# Altium PCB Extender_Remastered_V1.PcbDoc (part 2 of 2)
Units mm, origin at the board's own origin, x right, y up, seen from the top; angles counter-clockwise.
Board outline 188 x 60 mm, 2 copper layers (Top Layer, Bottom Layer); 132 components, 144 nets, 525 pads, 128 vias.
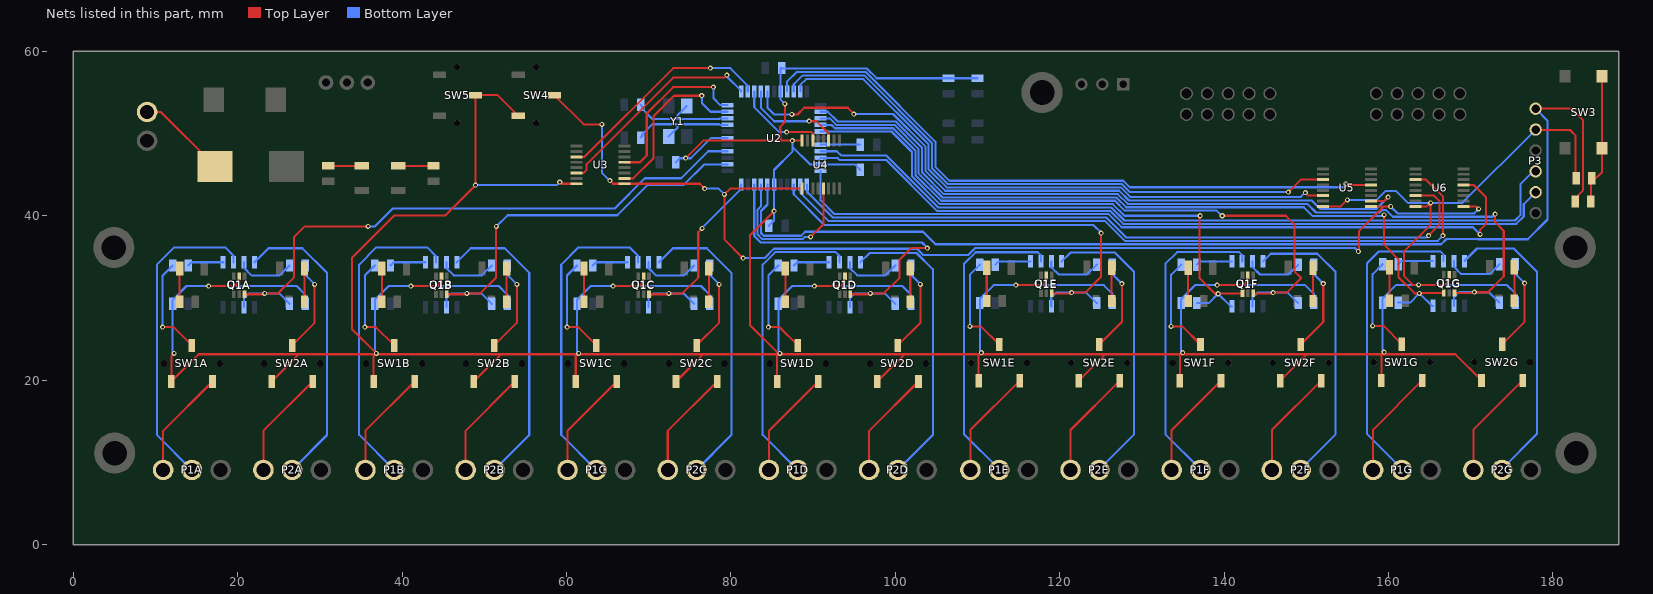
[diagram p2: the nets of this part, all layers, seen from the top]

## Via types
v1: diameter 0.61, hole 0.305, Top Layer to Bottom Layer, 128 vias

## Nets (pads, with @x,y where several pads share a name; then routed paths per layer and width w, separated by ;. In a path a pad name is that pad's centre, name@x,y a point inside that pad or via, vN(x,y) a via of type N, cw(c..) or ccw(c..) an arc to the next point about the centre after c; other vN are vias at no path point) (continued)
INA6: Q1F.8 R2F.2 U1F.1 U2.5 | length 71.1
  Top Layer w0.254: v1(137.075,40) 137.025,39.95 137.025,39.3 137.025,32.375 138.889,30.511 v1(139.26,30.511) 139.303,30.554 U1F.1@142.23,30.554
  Bottom Layer w0.254: U2.5@90.913,50.249 91.775,50.249 91.781,50.243 99.534,50.243 102.025,47.752 102.025,44.788 105.4,41.413 126.462,41.413 127.875,40 v1(137.075,40) ; R2F.2@136.678,29.377 138.126,29.377 v1(139.26,30.511) 140.789,28.982 Q1F.8@140.935,28.982
INA7: Q1G.8 R2G.2 U1G.1 U2.3 | length 95.3
  Top Layer w0.254: v1(159.475,40.1) 159.475,36.6 159.4,36.525 161.2,34.725 161.2,32.55 163.193,30.557 v1(163.76,30.557) 163.803,30.6 U1G.1@166.73,30.6
  Bottom Layer w0.254: U2.3@90.913,51.849 91.775,51.849 91.777,51.851 92.01,51.851 92.805,51.056 99.894,51.056 102.838,48.112 102.838,45.125 105.736,42.226 126.9,42.226 128.089,41.037 149.688,41.037 150.731,39.994 159.369,39.994 v1(159.475,40.1) ; R2G.2@161.178,29.423 162.626,29.423 v1(163.76,30.557) 165.289,29.028 Q1G.8@165.435,29.028
INA_MCU1: U2.34 U3.14 | length 26.3
  Top Layer w0.254: U3.14@61.229,45.21 62.085,45.21 62.45,45.575 62.45,46.276 72.974,56.8 79.2,56.8 v1(79.5,57.1)
  Bottom Layer w0.254: v1(79.5,57.1) 79.5,56.938 81.243,55.195 U2.34@81.243,55.119
INA_MCU2: U2.33 U3.5 | length 21
  Top Layer w0.254: U3.5@67.071,46.505 68.931,46.505 69.762,47.337 69.762,52.439 72.974,55.65 v1(77.875,55.65)
  Bottom Layer w0.254: v1@77.875,55.624 77.875,54.275 78.701,53.449 U2.33@79.573,53.449
INA_MCU3: U2.36 U4.14 | length 11.2
  Top Layer w0.254: v1(86.775,50.175) 89.825,50.175 89.96,50.04 U4.14@89.96,49.146
  Bottom Layer w0.254: U2.36@82.843,55.119 82.843,53.207 85.875,50.175 v1(86.775,50.175)
INA_MCU4: U2.19 U4.5 | length 19.5
  Top Layer w0.254: v1(89.7,37.425) 91.255,38.98 U4.5@91.255,43.304
  Bottom Layer w0.254: U2.19@83.643,43.779 83.643,41.143 83.249,40.749 83.249,37.726 83.819,37.156 88.706,37.156 88.975,37.425 v1(89.7,37.425)
INA_MCU5: U2.42 U5.11 | length 74
  Top Layer w0.254: v1(147.825,42.875) 149.34,44.39 U5.11@152.029,44.39
  Bottom Layer w0.254: U2.42@87.643,55.119 87.643,55.993 88.734,57.084 96.216,57.084 104.463,48.836 104.463,45.798 106.41,43.852 127.573,43.852 128.55,42.875 v1(147.825,42.875)
INA_MCU6: U2.38 U5.2 | length 87.9
  Top Layer w0.254: v1(87.425,52.325) 88.1,52.325 88.912,53.137 94.213,53.137 v1@94.95,52.4 ; U5.2@157.871,41.799 159.474,41.799 v1(159.95,42.275)
  Bottom Layer w0.254: U2.38@84.443,55.119 84.443,53.132 85.25,52.325 v1(87.425,52.325) ; v1(94.95,52.375) 99.724,52.375 103.651,48.448 103.651,45.461 106.073,43.039 127.237,43.039 128.426,41.85 150.675,41.85 151.7,40.825 158.5,40.825 v1(159.95,42.275)
INA_MCU7: U2.13 U6.11 | length 90.8
  Top Layer w0.254: U6.11@163.304,44.39 164.56,44.39 166.65,42.3 v1@166.65,37.575
  Bottom Layer w0.254: U2.13@88.443,43.779 88.443,42.8 91.862,39.381 125.494,39.381 127.935,36.94 165.99,36.94 v1(166.625,37.575)
INB1: Q1A.6 R3A.2 U1A.3 U2.26 | length 76.2
  Top Layer w0.254: U1A.3@20.83,30.454 23.166,30.454 v1(23.262,30.55) 24.9,30.55 26.825,32.475 26.825,37.375 28.15,38.7 v1(35.85,38.7)
  Bottom Layer w0.254: Q1A.6@20.775,28.882 20.775,29.963 21.362,30.55 v1(23.262,30.55) 25.029,30.55 R3A.2@26.302,29.277 ; v1(35.85,38.7) 36.7,38.7 38.875,40.875 65.85,40.875 69.537,44.562 73.943,44.562 77.231,47.849 U2.26@79.573,47.849
INB2: Q1B.6 R3B.2 U1B.3 U2.24 | length 56.6
  Top Layer w0.254: U1B.3@45.43,30.454 47.766,30.454 v1(47.862,30.55) 49.5,30.55 51.425,32.475 ; 51.425,37.375 51.425,32.475 ; v1(51.475,38.7) 51.425,38.65 51.425,32.475
  Bottom Layer w0.254: Q1B.6@45.375,28.882 45.375,29.963 45.962,30.55 v1(47.862,30.55) 49.629,30.55 R3B.2@50.902,29.277 ; v1(51.475,38.7) 52.837,40.062 66.187,40.062 69.873,43.749 74.28,43.749 76.78,46.249 U2.24@79.573,46.249
INB3: Q1C.6 R3C.2 U1C.3 U2.22 | length 32.6
  Top Layer w0.254: U1C.3@70.03,30.454 72.366,30.454 v1(72.462,30.55) 74.1,30.55 76.025,32.475 ; 76.025,37.375 76.025,32.475 ; v1(76.5,38.475) 76.025,38 76.025,32.475
  Bottom Layer w0.254: Q1C.6@69.975,28.882 69.975,29.963 70.562,30.55 v1(72.462,30.55) 74.229,30.55 R3C.2@75.502,29.277 ; v1(76.5,38.475) 76.5,38.531 81.243,43.274 U2.22@81.243,43.779
INB4: Q1D.6 R3D.2 U1D.3 U2.20 | length 48.3
  Top Layer w0.254: U1D.3@94.53,30.454 96.866,30.454 v1(96.962,30.55) 98.6,30.55 100.525,32.475 100.525,34.675 101.925,36.075 v1(103.9,36.075)
  Bottom Layer w0.254: U2.20@82.843,43.779 82.843,37.532 83.625,36.75 103.25,36.75 v1@103.9,36.1 ; Q1D.6@94.475,28.882 94.475,29.963 95.062,30.55 v1(96.962,30.55) 98.729,30.55 R3D.2@100.002,29.277
INB5: Q1E.6 R3E.2 U1E.3 U2.14 | length 60
  Top Layer w0.254: U1E.3@119.03,30.554 121.366,30.554 v1(121.462,30.65) 123.1,30.65 125.025,32.575 v1(125.025,37.875)
  Bottom Layer w0.254: U2.14@87.643,43.779 87.643,42.6 91.362,38.881 124.094,38.881 v1@125.05,37.925 ; Q1E.6@118.975,28.982 118.975,30.063 119.562,30.65 v1(121.462,30.65) 123.229,30.65 R3E.2@124.502,29.377
INB6: Q1F.6 R3F.2 U1F.3 U2.4 | length 85.6
  Top Layer w0.254: v1(139.775,40) 147.5,40 148.546,38.954 148.546,33.254 149.375,32.425 147.6,30.65 v1(145.962,30.65) 145.866,30.554 U1F.3@143.53,30.554
  Bottom Layer w0.254: U2.4@90.913,51.049 91.775,51.049 91.777,51.047 92.24,51.047 92.637,50.649 99.725,50.649 102.431,47.943 102.431,44.956 105.568,41.82 126.732,41.82 127.921,40.631 139.094,40.631 139.738,39.987 139.9,40.15 v1@139.775,40.15 ; Q1F.6@143.475,28.982 143.475,30.063 144.062,30.65 v1(145.962,30.65) 147.729,30.65 R3F.2@149.002,29.377
INB7: Q1G.6 R3G.2 U1G.3 U2.2 | length 116.6
  Top Layer w0.254: U1G.3@168.03,30.6 170.366,30.6 v1(170.462,30.696) 172.1,30.696 174.025,32.621 ; v1(172.975,40.2) 172.975,39.2 174.025,38.15 174.025,32.621 ; 174.025,37.521 174.025,32.621
  Bottom Layer w0.254: U2.2@90.913,52.649 91.775,52.649 91.781,52.655 92.974,51.462 100.062,51.462 103.244,48.28 103.244,45.293 105.905,42.633 127.068,42.633 128.257,41.444 150.131,41.444 151.174,40.401 158.949,40.401 159.233,40.684 159.717,40.684 160.526,39.875 172.65,39.875 v1(172.975,40.2) ; Q1G.6@167.975,29.028 167.975,30.109 168.562,30.696 v1(170.462,30.696) 172.229,30.696 R3G.2@173.502,29.423
INB_MCU1: U2.35 U3.11 | length 26.9
  Top Layer w0.254: U3.11@61.229,47.14 62.165,47.14 72.975,57.95 v1(77.5,57.95)
  Bottom Layer w0.254: v1(77.5,57.95) 79.925,57.95 82.043,55.832 U2.35@82.043,55.119
INB_MCU2: U2.32 U3.2 | length 20.9
  Top Layer w0.254: U3.2@67.071,44.549 68.124,44.549 70.575,47 70.575,52.102 73.073,54.6 v1(76.45,54.6)
  Bottom Layer w0.254: v1@76.475,54.575 76.475,53.692 77.518,52.649 U2.32@79.573,52.649
INB_MCU3: U2.37 U4.11 | length 12.4
  Top Layer w0.254: v1(89.525,51.5) 90.4,51.5 91.89,50.01 U4.11@91.89,49.146
  Bottom Layer w0.254: U2.37@83.643,55.119 83.643,53.132 85.275,51.5 v1(89.525,51.5)
INB_MCU4: U2.43 U5.14 | length 72.8
  Top Layer w0.254: v1(149.875,42.825) 150.24,42.46 U5.14@152.029,42.46
  Bottom Layer w0.254: U2.43@88.443,55.119 88.443,55.918 89.15,56.625 96.1,56.625 104.057,48.668 104.057,45.63 106.241,43.445 127.405,43.445 128.56,42.291 149.341,42.291 v1(149.875,42.825)
INB_MCU5: U2.41 U5.5 | length 80.6
  Top Layer w0.254: v1(154.8,43.85) 154.895,43.755 U5.5@157.871,43.755
  Bottom Layer w0.254: U2.41@86.843,55.119 86.843,56.343 87.99,57.49 96.384,57.49 104.87,49.005 104.87,45.966 106.578,44.258 127.742,44.258 128.535,43.465 154.515,43.465 v1@154.9,43.85
INB_MCU6: U2.12 U6.14 | length 86.8
  Top Layer w0.254: U6.14@163.304,42.46 165.515,42.46 166.225,41.75 166.225,38.975 v1@164.875,37.625
  Bottom Layer w0.254: U2.12@89.243,43.779 89.243,42.945 92.4,39.788 125.662,39.788 128.104,37.346 164.646,37.346 v1(164.875,37.575)
INB_MCU7: U2.11 U6.5 | length 93.7
  Top Layer w0.254: U6.5@169.146,43.755 170.345,43.755 171.875,42.225 171.875,39.044 171.15,38.319 v1(171.15,37.725)
  Bottom Layer w0.254: U2.11@90.913,45.449 90.913,41.881 92.6,40.194 125.957,40.194 127.551,38.6 170.275,38.6 v1(171.15,37.725)
MCLR: P3.1 R8.2 U2.18 | length 134.9
  Top Layer w0.254: P3.1@177.9,53.025 182.275,53.025 183.675,51.625 183.675,43.1 182.725,42.15 R8.2@182.725,41.725
  Bottom Layer w0.254: U2.18@84.443,43.779 84.443,41.368 83.656,40.581 83.656,37.894 83.987,37.563 88.538,37.563 89.025,38.05 103.375,38.05 104.891,36.534 166.41,36.534 167.051,37.175 170.874,37.175 170.908,37.141 176.941,37.141 179.35,39.55 179.35,51.575 P3.1@177.9,53.025
NetC3_2: C3.2 U2.30 Y1.1 | length 13.3
  Bottom Layer w0.254: C3.2@69.018,49.499 69.209,49.69 69.209,49.897 70.443,51.132 73.493,51.132 ; Y1.1@72.418,49.649 73.493,50.724 73.493,51.132 ; U2.30@79.573,51.049 78.648,51.049 78.565,51.132 73.493,51.132
NetC4_2: C4.2 U2.31 Y1.2 | length 13.5
  Bottom Layer w0.254: C4.2@69.018,53.499 69.209,53.308 69.209,53.001 70.443,51.767 73.493,51.767 ; Y1.2@74.618,53.349 73.493,52.224 73.493,51.767 ; U2.31@79.573,51.849 78.648,51.849 78.565,51.767 73.493,51.767
NetC6_2: C6.2 U2.7 | length 4.8
  Bottom Layer w0.254: U2.7@90.913,48.649 C6.2@95.718,48.649
NetF1_1: F1.1 P6.2 | length 11
  Top Layer w0.254: P6.2@8.975,52.625 10.625,52.625 F1.1@17.25,46
NetLED1A_1: LED1A.1 R4A.2 | length 4.1
  Top Layer w0.254: R4A.2@12.925,29.522 LED1A.1@12.925,33.586
NetLED1B_1: LED1B.1 R4B.2 | length 4.1
  Top Layer w0.254: R4B.2@37.525,29.522 LED1B.1@37.525,33.586
NetLED1C_1: LED1C.1 R4C.2 | length 4.1
  Top Layer w0.254: R4C.2@62.125,29.522 LED1C.1@62.125,33.586
NetLED1D_1: LED1D.1 R4D.2 | length 4.1
  Top Layer w0.254: R4D.2@86.625,29.522 LED1D.1@86.625,33.586
NetLED1E_1: LED1E.1 R4E.2 | length 4.1
  Top Layer w0.254: R4E.2@111.125,29.622 LED1E.1@111.125,33.686
NetLED1F_1: LED1F.1 R4F.2 | length 4.1
  Top Layer w0.254: R4F.2@135.625,29.622 LED1F.1@135.625,33.686
NetLED1G_1: LED1G.1 R4G.2 | length 4.1
  Top Layer w0.254: R4G.2@160.125,29.668 LED1G.1@160.125,33.732
NetLED2A_1: LED2A.1 R5A.2 | length 4.1
  Top Layer w0.254: R5A.2@28.117,29.522 LED2A.1@28.117,33.586
NetLED2B_1: LED2B.1 R5B.2 | length 4.1
  Top Layer w0.254: R5B.2@52.717,29.522 LED2B.1@52.717,33.586
NetLED2C_1: LED2C.1 R5C.2 | length 4.1
  Top Layer w0.254: R5C.2@77.317,29.522 LED2C.1@77.317,33.586
NetLED2D_1: LED2D.1 R5D.2 | length 4.1
  Top Layer w0.254: R5D.2@101.817,29.522 LED2D.1@101.817,33.586
NetLED2E_1: LED2E.1 R5E.2 | length 4.1
  Top Layer w0.254: R5E.2@126.317,29.622 LED2E.1@126.317,33.686
NetLED2F_1: LED2F.1 R5F.2 | length 4.1
  Top Layer w0.254: R5F.2@150.817,29.622 LED2F.1@150.817,33.686
NetLED2G_1: LED2G.1 R5G.2 | length 4.1
  Top Layer w0.254: R5G.2@175.317,29.668 LED2G.1@175.317,33.732
NetLED3_2: LED3.2 R11.1 | length 4.3
  Top Layer w0.254: LED3.2@39.508,46.075 R11.1@43.825,46.075
NetLED4_2: LED4.2 R12.1 | length 4.1
  Top Layer w0.254: R12.1@31,46.075 LED4.2@35.067,46.075
NetP1A_2: P1A.2 Q1A.2 | length 38.1
  Bottom Layer w0.254: P1A.2@14.425,9.075 10.162,13.338 10.162,34.05 12.262,36.15 18.462,36.15 19.505,35.107 Q1A.2@19.505,34.347
NetP1A_3: P1A.3 SW1A.3 | length 13.2
  Top Layer w0.254: P1A.3@10.925,9.075 10.925,13.829 SW1A.3@16.925,19.829
NetP1B_2: P1B.2 Q1B.2 | length 38.1
  Bottom Layer w0.254: P1B.2@39.025,9.075 34.762,13.338 34.762,34.05 36.862,36.15 43.062,36.15 44.105,35.107 Q1B.2@44.105,34.347
NetP1B_3: P1B.3 SW1B.3 | length 13.2
  Top Layer w0.254: P1B.3@35.525,9.075 35.525,13.829 SW1B.3@41.525,19.829
NetP1C_2: P1C.2 Q1C.2 | length 38.1
  Bottom Layer w0.254: P1C.2@63.625,9.075 59.362,13.338 59.362,34.05 61.462,36.15 67.662,36.15 68.705,35.107 Q1C.2@68.705,34.347
NetP1C_3: P1C.3 SW1C.3 | length 13.2
  Top Layer w0.254: P1C.3@60.125,9.075 60.125,13.829 SW1C.3@66.125,19.829
NetP1D_2: P1D.2 Q1D.2 | length 37.7
  Bottom Layer w0.254: P1D.2@88.125,9.075 83.862,13.338 83.862,34.05 85.387,35.575 92.737,35.575 93.205,35.107 Q1D.2@93.205,34.347
NetP1D_3: P1D.3 SW1D.3 | length 13.2
  Top Layer w0.254: P1D.3@84.625,9.075 84.625,13.829 SW1D.3@90.625,19.829
NetP1E_2: P1E.2 Q1E.2 | length 37.6
  Bottom Layer w0.254: P1E.2@112.625,9.175 108.362,13.438 108.362,34.15 109.774,35.562 117.35,35.562 117.705,35.207 Q1E.2@117.705,34.447
NetP1E_3: P1E.3 SW1E.3 | length 13.2
  Top Layer w0.254: P1E.3@109.125,9.175 109.125,13.929 SW1E.3@115.125,19.929
NetP1F_2: P1F.2 Q1F.2 | length 37.6
  Bottom Layer w0.254: P1F.2@137.125,9.175 132.862,13.438 132.862,34.15 134.287,35.575 141.837,35.575 142.205,35.207 Q1F.2@142.205,34.447
NetP1F_3: P1F.3 SW1F.3 | length 13.2
  Top Layer w0.254: P1F.3@133.625,9.175 133.625,13.929 SW1F.3@139.625,19.929
NetP1G_2: P1G.2 Q1G.2 | length 37.6
  Bottom Layer w0.254: P1G.2@161.625,9.221 157.362,13.484 157.362,34.196 158.841,35.675 166.283,35.675 166.705,35.253 Q1G.2@166.705,34.493
NetP1G_3: P1G.3 SW1G.3 | length 13.2
  Top Layer w0.254: P1G.3@158.125,9.221 158.125,13.975 SW1G.3@164.125,19.975
NetP2A_2: P2A.2 Q1A.4 | length 36.5
  Bottom Layer w0.254: Q1A.4@22.045,34.347 23.749,36.05 27.862,36.05 30.862,33.05 30.862,13.32 P2A.2@26.617,9.075
NetP2A_3: P2A.3 SW2A.3 | length 13.2
  Top Layer w0.254: P2A.3@23.117,9.075 23.117,13.829 SW2A.3@29.117,19.829
NetP2B_2: P2B.2 Q1B.4 | length 36.5
  Bottom Layer w0.254: Q1B.4@46.645,34.347 48.349,36.05 52.462,36.05 55.462,33.05 55.462,13.32 P2B.2@51.217,9.075
NetP2B_3: P2B.3 SW2B.3 | length 13.2
  Top Layer w0.254: P2B.3@47.717,9.075 47.717,13.829 SW2B.3@53.717,19.829
NetP2C_2: P2C.2 Q1C.4 | length 36.5
  Bottom Layer w0.254: Q1C.4@71.245,34.347 72.949,36.05 77.062,36.05 80.062,33.05 80.062,13.32 P2C.2@75.817,9.075
NetP2C_3: P2C.3 SW2C.3 | length 13.2
  Top Layer w0.254: P2C.3@72.317,9.075 72.317,13.829 SW2C.3@78.317,19.829
NetP2D_2: P2D.2 Q1D.4 | length 36.3
  Bottom Layer w0.254: Q1D.4@95.745,34.347 96.874,35.475 102.575,35.475 104.562,33.488 104.562,13.32 P2D.2@100.317,9.075
NetP2D_3: P2D.3 SW2D.3 | length 13.2
  Top Layer w0.254: P2D.3@96.817,9.075 96.817,13.829 SW2D.3@102.817,19.829
NetP2E_2: P2E.2 Q1E.4 | length 36
  Bottom Layer w0.254: Q1E.4@120.245,34.447 121.324,35.525 126.687,35.525 129.062,33.15 129.062,13.42 P2E.2@124.817,9.175
NetP2E_3: P2E.3 SW2E.3 | length 13.2
  Top Layer w0.254: P2E.3@121.317,9.175 121.317,13.929 SW2E.3@127.317,19.929
NetP2F_2: P2F.2 Q1F.4 | length 35.9
  Bottom Layer w0.254: Q1F.4@144.745,34.447 145.674,35.375 151.337,35.375 153.562,33.15 153.562,13.42 P2F.2@149.317,9.175
NetP2F_3: P2F.3 SW2F.3 | length 13.2
  Top Layer w0.254: P2F.3@145.817,9.175 145.817,13.929 SW2F.3@151.817,19.929
NetP2G_2: P2G.2 Q1G.4 | length 36.4
  Bottom Layer w0.254: Q1G.4@169.245,34.493 170.771,36.019 175.239,36.019 178.062,33.196 178.062,13.466 P2G.2@173.817,9.221
NetP2G_3: P2G.3 SW2G.3 | length 13.2
  Top Layer w0.254: P2G.3@170.317,9.221 170.317,13.975 SW2G.3@176.317,19.975
NetQ1A_1: Q1A.1 R1A.1 | length 4.4
  Bottom Layer w0.254: R1A.1@13.978,33.952 14.373,34.347 Q1A.1@18.235,34.347
NetQ1A_3: Q1A.3 R6A.1 | length 7.1
  Bottom Layer w0.254: Q1A.3@20.775,34.347 20.775,33.637 21.662,32.75 25.1,32.75 R6A.1@26.302,33.952
NetQ1B_1: Q1B.1 R1B.1 | length 4.4
  Bottom Layer w0.254: R1B.1@38.578,33.952 38.973,34.347 Q1B.1@42.835,34.347
NetQ1B_3: Q1B.3 R6B.1 | length 7.1
  Bottom Layer w0.254: Q1B.3@45.375,34.347 45.375,33.637 46.262,32.75 49.7,32.75 R6B.1@50.902,33.952
NetQ1C_1: Q1C.1 R1C.1 | length 4.4
  Bottom Layer w0.254: R1C.1@63.178,33.952 63.573,34.347 Q1C.1@67.435,34.347
NetQ1C_3: Q1C.3 R6C.1 | length 7.1
  Bottom Layer w0.254: Q1C.3@69.975,34.347 69.975,33.637 70.862,32.75 74.3,32.75 R6C.1@75.502,33.952
NetQ1D_1: Q1D.1 R1D.1 | length 4.4
  Bottom Layer w0.254: R1D.1@87.678,33.952 88.073,34.347 Q1D.1@91.935,34.347
NetQ1D_3: Q1D.3 R6D.1 | length 7.1
  Bottom Layer w0.254: Q1D.3@94.475,34.347 94.475,33.637 95.362,32.75 98.8,32.75 R6D.1@100.002,33.952
NetQ1E_1: Q1E.1 R1E.1 | length 4.4
  Bottom Layer w0.254: R1E.1@112.178,34.052 112.573,34.447 Q1E.1@116.435,34.447
NetQ1E_3: Q1E.3 R6E.1 | length 7.1
  Bottom Layer w0.254: Q1E.3@118.975,34.447 118.975,33.737 119.862,32.85 123.3,32.85 R6E.1@124.502,34.052
NetQ1F_1: Q1F.1 R1F.1 | length 4.4
  Bottom Layer w0.254: R1F.1@136.678,34.052 137.073,34.447 Q1F.1@140.935,34.447
NetQ1F_3: Q1F.3 R6F.1 | length 7.1
  Bottom Layer w0.254: Q1F.3@143.475,34.447 143.475,33.737 144.362,32.85 147.8,32.85 R6F.1@149.002,34.052
NetQ1G_1: Q1G.1 R1G.1 | length 4.4
  Bottom Layer w0.254: R1G.1@161.178,34.098 161.573,34.493 Q1G.1@165.435,34.493
NetQ1G_3: Q1G.3 R6G.1 | length 7.1
  Bottom Layer w0.254: Q1G.3@167.975,34.493 167.975,33.783 168.862,32.896 172.3,32.896 R6G.1@173.502,34.098
NetR1A_2: R1A.2 SW1A.2 | length 12.5
  Top Layer w0.254: v1(10.862,26.45) 12.204,26.45 SW1A.2@14.425,24.229
  Bottom Layer w0.254: v1(10.862,26.45) 10.862,32.736 R1A.2@12.078,33.952
NetR1B_2: R1B.2 SW1B.2 | length 12.5
  Top Layer w0.254: v1(35.462,26.45) 36.804,26.45 SW1B.2@39.025,24.229
  Bottom Layer w0.254: v1(35.462,26.45) 35.462,32.736 R1B.2@36.678,33.952
NetR1C_2: R1C.2 SW1C.2 | length 12.5
  Top Layer w0.254: v1(60.062,26.45) 61.404,26.45 SW1C.2@63.625,24.229
  Bottom Layer w0.254: v1(60.062,26.45) 60.062,32.736 R1C.2@61.278,33.952
NetR1D_2: R1D.2 SW1D.2 | length 12.5
  Top Layer w0.254: v1(84.562,26.45) 85.904,26.45 SW1D.2@88.125,24.229
  Bottom Layer w0.254: v1(84.562,26.45) 84.562,32.736 R1D.2@85.778,33.952
NetR1E_2: R1E.2 SW1E.2 | length 12.5
  Top Layer w0.254: v1(109.062,26.55) 110.404,26.55 SW1E.2@112.625,24.329
  Bottom Layer w0.254: v1(109.062,26.55) 109.062,32.836 R1E.2@110.278,34.052
NetR1F_2: R1F.2 SW1F.2 | length 12.5
  Top Layer w0.254: v1(133.562,26.55) 134.904,26.55 SW1F.2@137.125,24.329
  Bottom Layer w0.254: v1(133.562,26.55) 133.562,32.836 R1F.2@134.778,34.052
NetR1G_2: R1G.2 SW1G.2 | length 12.5
  Top Layer w0.254: v1(158.062,26.596) 159.404,26.596 SW1G.2@161.625,24.375
  Bottom Layer w0.254: v1(158.062,26.596) 158.062,32.882 R1G.2@159.278,34.098
NetR6A_2: R6A.2 SW2A.2 | length 11.3
  Top Layer w0.254: SW2A.2@26.617,24.229 29.362,26.974 v1(29.362,31.65)
  Bottom Layer w0.254: R6A.2@28.202,33.952 28.202,32.81 v1(29.362,31.65)
NetR6B_2: R6B.2 SW2B.2 | length 11.3
  Top Layer w0.254: SW2B.2@51.217,24.229 53.962,26.974 v1(53.962,31.65)
  Bottom Layer w0.254: R6B.2@52.802,33.952 52.802,32.81 v1(53.962,31.65)
NetR6C_2: R6C.2 SW2C.2 | length 11.3
  Top Layer w0.254: SW2C.2@75.817,24.229 78.562,26.974 v1(78.562,31.65)
  Bottom Layer w0.254: R6C.2@77.402,33.952 77.402,32.81 v1(78.562,31.65)
NetR6D_2: R6D.2 SW2D.2 | length 11.3
  Top Layer w0.254: SW2D.2@100.317,24.229 103.062,26.974 v1(103.062,31.65)
  Bottom Layer w0.254: R6D.2@101.902,33.952 101.902,32.81 v1(103.062,31.65)
NetR6E_2: R6E.2 SW2E.2 | length 11.3
  Top Layer w0.254: SW2E.2@124.817,24.329 127.562,27.074 v1(127.562,31.75)
  Bottom Layer w0.254: R6E.2@126.402,34.052 126.402,32.91 v1(127.562,31.75)
NetR6F_2: R6F.2 SW2F.2 | length 11.3
  Top Layer w0.254: SW2F.2@149.317,24.329 152.062,27.074 v1(152.062,31.75)
  Bottom Layer w0.254: R6F.2@150.902,34.052 150.902,32.91 v1(152.062,31.75)
NetR6G_2: R6G.2 SW2G.2 | length 11.3
  Top Layer w0.254: SW2G.2@173.817,24.375 176.562,27.12 v1(176.562,31.796)
  Bottom Layer w0.254: R6G.2@175.402,34.098 175.402,32.956 v1(176.562,31.796)
NetR7_1: R7.1 R8.1 SW3.3 SW3.4 | length 16
  Top Layer w0.254: R8.1@184.625,41.725 184.625,44.475 R7.1@184.725,44.575 ; R7.1@184.988,44.312 185.975,45.3 SW3.3@185.975,48.225 SW3.4@185.975,56.975
NetSW4_2: SW4.2 U3.1 U4.1 U5.1 U6.1 | length 146
  Top Layer w0.254: SW4.2@58.525,54.675 62.075,51.125 v1(64.3,51.125) ; v1(65.275,44.275) 65.661,43.889 U3.1@67.071,43.889 76.211,43.889 v1(76.8,43.3) ; v1(81.475,34.85) 79.2,37.125 v1(79.2,42.6) 79.904,43.304 U4.1@88.639,43.304 ; v1(156.35,35.65) 156.4,35.7 156.4,38.125 159.4,41.125 ; U5.1@157.871,41.139 157.885,41.125 159.4,41.125 ; v1(160.25,41.125) 159.4,41.125 ; U6.1@169.146,41.139 170.636,41.139 v1@170.9,40.875
  Bottom Layer w0.254: v1(64.3,51.125) 64.3,45.25 v1(65.275,44.275) ; v1(76.8,43.3) 78.5,43.3 v1(79.2,42.6) ; v1(81.475,34.85) 84.087,34.85 85.219,35.981 102.644,35.981 103.425,35.2 108.837,35.2 109.719,36.081 155.919,36.081 v1(156.35,35.65) ; v1(160.25,41.125) 161.094,40.281 170.431,40.281 v1(170.975,40.825)
PGC2: P3.5 U2.9 | length 92.8
  Bottom Layer w0.254: U2.9@90.913,47.049 90.939,47.023 92.965,47.023 93.197,46.791 98.873,46.791 105.063,40.601 126.125,40.601 127.719,39.006 175.556,39.006 176.456,39.906 176.456,41.421 P3.5@177.9,42.865
PGD2: P3.4 U2.8 | length 95.2
  Bottom Layer w0.254: U2.8@90.913,47.849 92.893,47.849 93.418,47.324 98.914,47.324 105.231,41.007 126.293,41.007 127.885,39.416 175.391,39.416 176.05,40.075 176.05,43.85 177.605,45.405 P3.4@177.9,45.405
VCC: C5.2 C7.2 C8.2 C9.2 P3.2 R2A.1 R2B.1 R2C.1 R2D.1 R2E.1 R2F.1 R2G.1 R3A.1 R3B.1 R3C.1 R3D.1 R3E.1 R3F.1 R3G.1 R7.2 R9.2 R10.2 SW1A.1 SW1B.1 SW1C.1 SW1D.1 SW1E.1 SW1F.1 SW1G.1 SW2A.1 SW2B.1 SW2C.1 SW2D.1 SW2E.1 SW2F.1 SW2G.1 SW4.3 SW5.2 U1A.5 U1B.5 U1C.5 U1D.5 U1E.5 U1F.5 U1G.5 U2.10 U2.17 U2.28 U2.40 U3.16 U4.16 U5.16 U6.16 | length 635.6
  Top Layer w0.254: v1(12.262,23.25) 11.925,22.913 SW1A.1@11.925,19.829 15.246,23.15 27.438,23.15 ; v1(16.462,31.45) 19.662,31.45 20.18,31.968 U1A.5@20.18,32.654 ; SW2A.1@24.117,19.829 27.438,23.15 ; SW1B.1@36.525,19.829 36.525,22.913 v1@36.762,23.15 ; v1(36.862,23.25) 33.9,26.212 33.9,34.875 39.05,40.025 45.225,40.025 v1(48.925,43.725) SW5.2@48.925,54.675 51.625,54.675 SW4.3@54.125,52.175 ; v1(41.062,31.45) 44.262,31.45 44.78,31.968 U1B.5@44.78,32.654 ; SW2B.1@48.717,19.829 52.038,23.15 ; v1(59.175,44.1) 59.386,43.889 U3.16@61.229,43.889 ; SW1C.1@61.125,19.829 61.125,22.913 v1@61.362,23.15 ; v1(65.662,31.45) 68.862,31.45 69.38,31.968 U1C.5@69.38,32.654 ; SW2C.1@73.317,19.829 76.638,23.15 ; v1(74.5,47) 76.646,49.146 v1(87.471,49.146) U4.16@88.639,49.146 ; v1(85.25,40.575) 82.325,37.65 82.325,26.686 v1@85.862,23.15 ; SW1D.1@85.625,19.829 85.625,22.913 v1@85.862,23.15 ; 86,49.146 86,50.85 86.575,51.425 v1(86.575,53.6) ; v1(90.162,31.45) 93.362,31.45 93.88,31.968 U1D.5@93.88,32.654 ; SW2D.1@97.817,19.829 101.138,23.15 ; SW1E.1@110.125,19.929 110.125,23.013 v1@110.262,23.15 ; v1(114.662,31.55) 117.862,31.55 118.38,32.068 U1E.5@118.38,32.754 ; SW2E.1@122.317,19.929 125.538,23.15 ; SW1F.1@134.625,19.929 134.625,23.013 v1@134.762,23.15 ; v1(139.162,31.55) 142.362,31.55 142.88,32.068 U1F.5@142.88,32.754 ; SW2F.1@146.817,19.929 150.038,23.15 ; U5.16@152.029,41.139 154.214,41.139 v1(155,41.925) ; SW1G.1@159.125,19.975 159.125,23.059 159.216,23.15 ; U6.16@163.304,41.139 164.689,41.139 v1(165.125,41.575) 165.125,38.9 161.9,35.675 161.9,32.65 162.954,31.596 v1(163.662,31.596) 166.862,31.596 167.38,32.114 U1G.5@167.38,32.8 ; SW2G.1@171.317,19.975 168.142,23.15 159.216,23.15 ; P3.2@177.9,50.485 177.96,50.425 182.075,50.425 182.775,49.725 R7.2@182.775,44 ; 27.438,23.15 v1@36.762,23.15 ; v1@36.762,23.15 52.038,23.15 ; 52.038,23.15 v1@61.362,23.15 ; v1@61.362,23.15 76.638,23.15 ; 76.638,23.15 v1@85.862,23.15 ; v1@85.862,23.15 101.138,23.15 ; 101.138,23.15 v1@110.262,23.15 ; v1@110.262,23.15 125.538,23.15 ; 125.538,23.15 v1@134.762,23.15 ; v1@134.762,23.15 150.038,23.15 ; 150.038,23.15 159.216,23.15
  Bottom Layer w0.254: v1(12.262,23.25) 12.078,23.434 R2A.1@12.078,29.277 12.078,29.766 13.762,31.45 v1(16.462,31.45) 27.162,31.45 28.202,30.41 R3A.1@28.202,29.277 ; v1(36.862,23.25) 36.678,23.434 R2B.1@36.678,29.277 36.678,29.766 38.362,31.45 v1(41.062,31.45) 51.762,31.45 52.802,30.41 R3B.1@52.802,29.277 ; v1(48.925,43.725) 58.8,43.725 v1(59.175,44.1) ; v1(61.462,23.25) 61.278,23.434 R2C.1@61.278,29.277 61.278,29.766 62.962,31.45 v1(65.662,31.45) 76.362,31.45 77.402,30.41 R3C.1@77.402,29.277 ; C9.2@73.293,46.499 73.794,47 v1(74.5,47) 75.119,47 77.568,49.449 U2.28@79.573,49.449 ; C7.2@84.618,38.774 85.243,39.399 U2.17@85.243,43.779 85.243,45.568 87.471,47.796 87.471,48.404 ; v1(85.962,23.25) 85.778,23.434 R2D.1@85.778,29.277 85.778,29.766 87.462,31.45 v1(90.162,31.45) 100.862,31.45 101.902,30.41 R3D.1@101.902,29.277 ; C5.2@86.043,57.975 U2.40@86.043,55.119 86.043,54.132 v1(86.575,53.6) ; C5.2@86.175,57.975 86.253,57.897 96.552,57.897 97.724,56.725 R10.2@106.475,56.725 R9.2@110,56.725 ; v1(87.471,49.146) 87.471,48.404 ; C8.2@95.718,45.599 95.068,46.249 U2.10@90.913,46.249 89.626,46.249 87.471,48.404 ; v1(110.462,23.35) 110.278,23.534 R2E.1@110.278,29.377 110.278,29.866 111.962,31.55 v1(114.662,31.55) 125.362,31.55 126.402,30.51 R3E.1@126.402,29.377 ; v1(134.962,23.35) 134.778,23.534 R2F.1@134.778,29.377 134.778,29.866 136.462,31.55 v1(139.162,31.55) 149.862,31.55 150.902,30.51 R3F.1@150.902,29.377 ; v1(155,41.925) 158.55,41.925 159.65,43.025 160.9,43.025 162.35,41.575 v1(165.125,41.575) 168.99,41.575 P3.2@177.9,50.485 ; v1(159.462,23.396) 159.278,23.58 R2G.1@159.278,29.423 159.278,29.912 160.962,31.596 v1(163.662,31.596) 174.362,31.596 175.402,30.556 R3G.1@175.402,29.423
pads on no net: P3.6 P4.6 P5.6 SW1A. SW1B. SW1C. SW1D. SW1E. SW1F. SW1G. SW2A. SW2B. SW2C. SW2D. SW2E. SW2F. SW2G. SW4. SW5. U2.6 U4.2 U4.3 U4.4 U6.2 U6.3 U6.4 Y1.

## Polygon pours and split planes (outlines as drawn)
GND on Bottom Layer "Bot GND" (solid, pour order 2): 0.25,0.25 187.75,0.25 187.75,59.75 0.25,59.75
GND on Top Layer "Top GND" (solid, pour order 4): 0.25,0.25 0.25,59.75 187.75,59.75 187.75,0.25

## Keep-outs
Keep-Out Layer:
  lines w0.254: 0,60 0,0 188,0 ; 0,60 0,60 ; 0,60 188,60 ; 188,0 188,60 ; 188,0 188,0 ; 188,60 188,60

## Silkscreen, mask and mechanical layers (free items; w line width, h text height)
Top Overlay:
  drawing of 1961 lines, arcs and shapes, not listed
  text "VCC" at 39.675,58.375 h1
  text "I2C" at 125.2,57.85 h1
  text "mcu" at 59.675,57.3 h1
  text "EXTENDERv2.0" at 80.825,56.95 h2
  text "ext" at 39.675,56.8 h1
  text "7-36V" at 5.625,55.975 h1
  text "+ -" at 11.475,53.475 h2 r270
  text "SDA" at 120.8,53.25 h1
  text "SCL" at 124.075,53.25 h1
  text "GND" at 127.075,53.25 h1
  text "^" at 181,52.75 h1 r90
  text "int" at 39.675,51.675 h1
  text "dir" at 59.875,51.175 h1
  text "13 14 NC GND 3V3" at 130.3,45.475 h1
  text "6 7 NC GND 3V3" at 114.625,45.4 h1
  text "Ch" at 110.55,44.325 h1
  text "8  9 10  11  12" at 130.9,43.575 h1
  text "1 2  3  4   5" at 114.675,43.425 h1
  text "P4    OUTPUT Connector   P5" at 116.2,41.15 h1
  text "wet" at 163.525,17.638 h1
  text "wet" at 175.717,17.638 h1
  text "wet" at 114.525,17.592 h1
  text "wet" at 126.717,17.592 h1
  text "wet" at 139.025,17.592 h1
  text "wet" at 151.217,17.592 h1
  text "wet" at 16.325,17.492 h1
  text "wet" at 28.517,17.492 h1
  text "wet" at 40.925,17.492 h1
  text "wet" at 53.117,17.492 h1
  text "wet" at 65.525,17.492 h1
  text "wet" at 77.717,17.492 h1
  text "wet" at 90.025,17.492 h1
  text "wet" at 102.217,17.492 h1
  text "dry" at 157.275,17.471 h1
  text "dry" at 169.467,17.471 h1
  text "dry" at 108.275,17.425 h1
  text "dry" at 120.467,17.425 h1
  text "dry" at 132.775,17.425 h1
  text "dry" at 144.967,17.425 h1
  text "dry" at 10.075,17.325 h1
  text "dry" at 22.267,17.325 h1
  text "dry" at 34.675,17.325 h1
  text "dry" at 46.867,17.325 h1
  text "dry" at 59.275,17.325 h1
  text "dry" at 71.467,17.325 h1
  text "dry" at 83.775,17.325 h1
  text "dry" at 95.967,17.325 h1
  text "CH13" at 159.876,14.174 h1
  text "CH14" at 172.068,14.174 h1
  text "CH9" at 111.459,14.128 h1
  text "CH10" at 123.068,14.128 h1
  text "CH11" at 135.542,14.128 h1
  text "CH12" at 147.568,14.128 h1
  text "CH1" at 13.259,14.028 h1
  text "CH2" at 25.451,14.028 h1
  text "CH3" at 37.859,14.028 h1
  text "CH4" at 50.051,14.028 h1
  text "CH5" at 62.459,14.028 h1
  text "CH6" at 74.651,14.028 h1
  text "CH7" at 86.959,14.028 h1
  text "CH8" at 99.151,14.028 h1
  text "1" at 157.958,12.146 h1
  text "2" at 161.292,12.146 h1
  text "3" at 164.792,12.146 h1
  text "1" at 170.15,12.146 h1
  text "2" at 173.484,12.146 h1
  text "3" at 176.984,12.146 h1
  text "1" at 108.958,12.1 h1
  text "2" at 112.292,12.1 h1
  text "3" at 115.792,12.1 h1
  text "1" at 121.15,12.1 h1
  text "2" at 124.484,12.1 h1
  text "3" at 127.984,12.1 h1
  text "1" at 133.458,12.1 h1
  text "2" at 136.792,12.1 h1
  text "3" at 140.292,12.1 h1
  text "1" at 145.65,12.1 h1
  text "2" at 148.984,12.1 h1
  text "3" at 152.484,12.1 h1
  text "1" at 10.758,12 h1
  text "2" at 14.092,12 h1
  text "3" at 17.592,12 h1
  text "1" at 22.95,12 h1
  text "2" at 26.284,12 h1
  text "3" at 29.784,12 h1
  text "1" at 35.358,12 h1
  text "2" at 38.692,12 h1
  text "3" at 42.192,12 h1
  text "1" at 47.55,12 h1
  text "2" at 50.884,12 h1
  text "3" at 54.384,12 h1
  text "1" at 59.958,12 h1
  text "2" at 63.292,12 h1
  text "3" at 66.792,12 h1
  text "1" at 72.15,12 h1
  text "2" at 75.484,12 h1
  text "3" at 78.984,12 h1
  text "1" at 84.458,12 h1
  text "2" at 87.792,12 h1
  text "3" at 91.292,12 h1
  text "1" at 96.65,12 h1
  text "2" at 99.984,12 h1
  text "3" at 103.484,12 h1
  text "PT010720" at 1.725,0.85 h1 r90
Mechanical 1:
  rectangle: 0.1,2.125 10.1,45.125
  rectangle: 177.975,2.125 187.975,45.125

## Dimensions
182.825,11.125 to 5.025,11.125 on Bottom Overlay
182.725,36.125 to 182.825,11.125 on Bottom Overlay